# Altium PCB ADCS.PcbDoc
Units mm, origin at the board's own origin, x right, y up, seen from the top; angles counter-clockwise.
Board outline 35.05 x 86.56 mm, 2 copper layers (Top Layer, Bottom Layer); 55 components, 76 nets, 305 pads, 140 vias.
Unrouted connection lines stored in the file: 60.
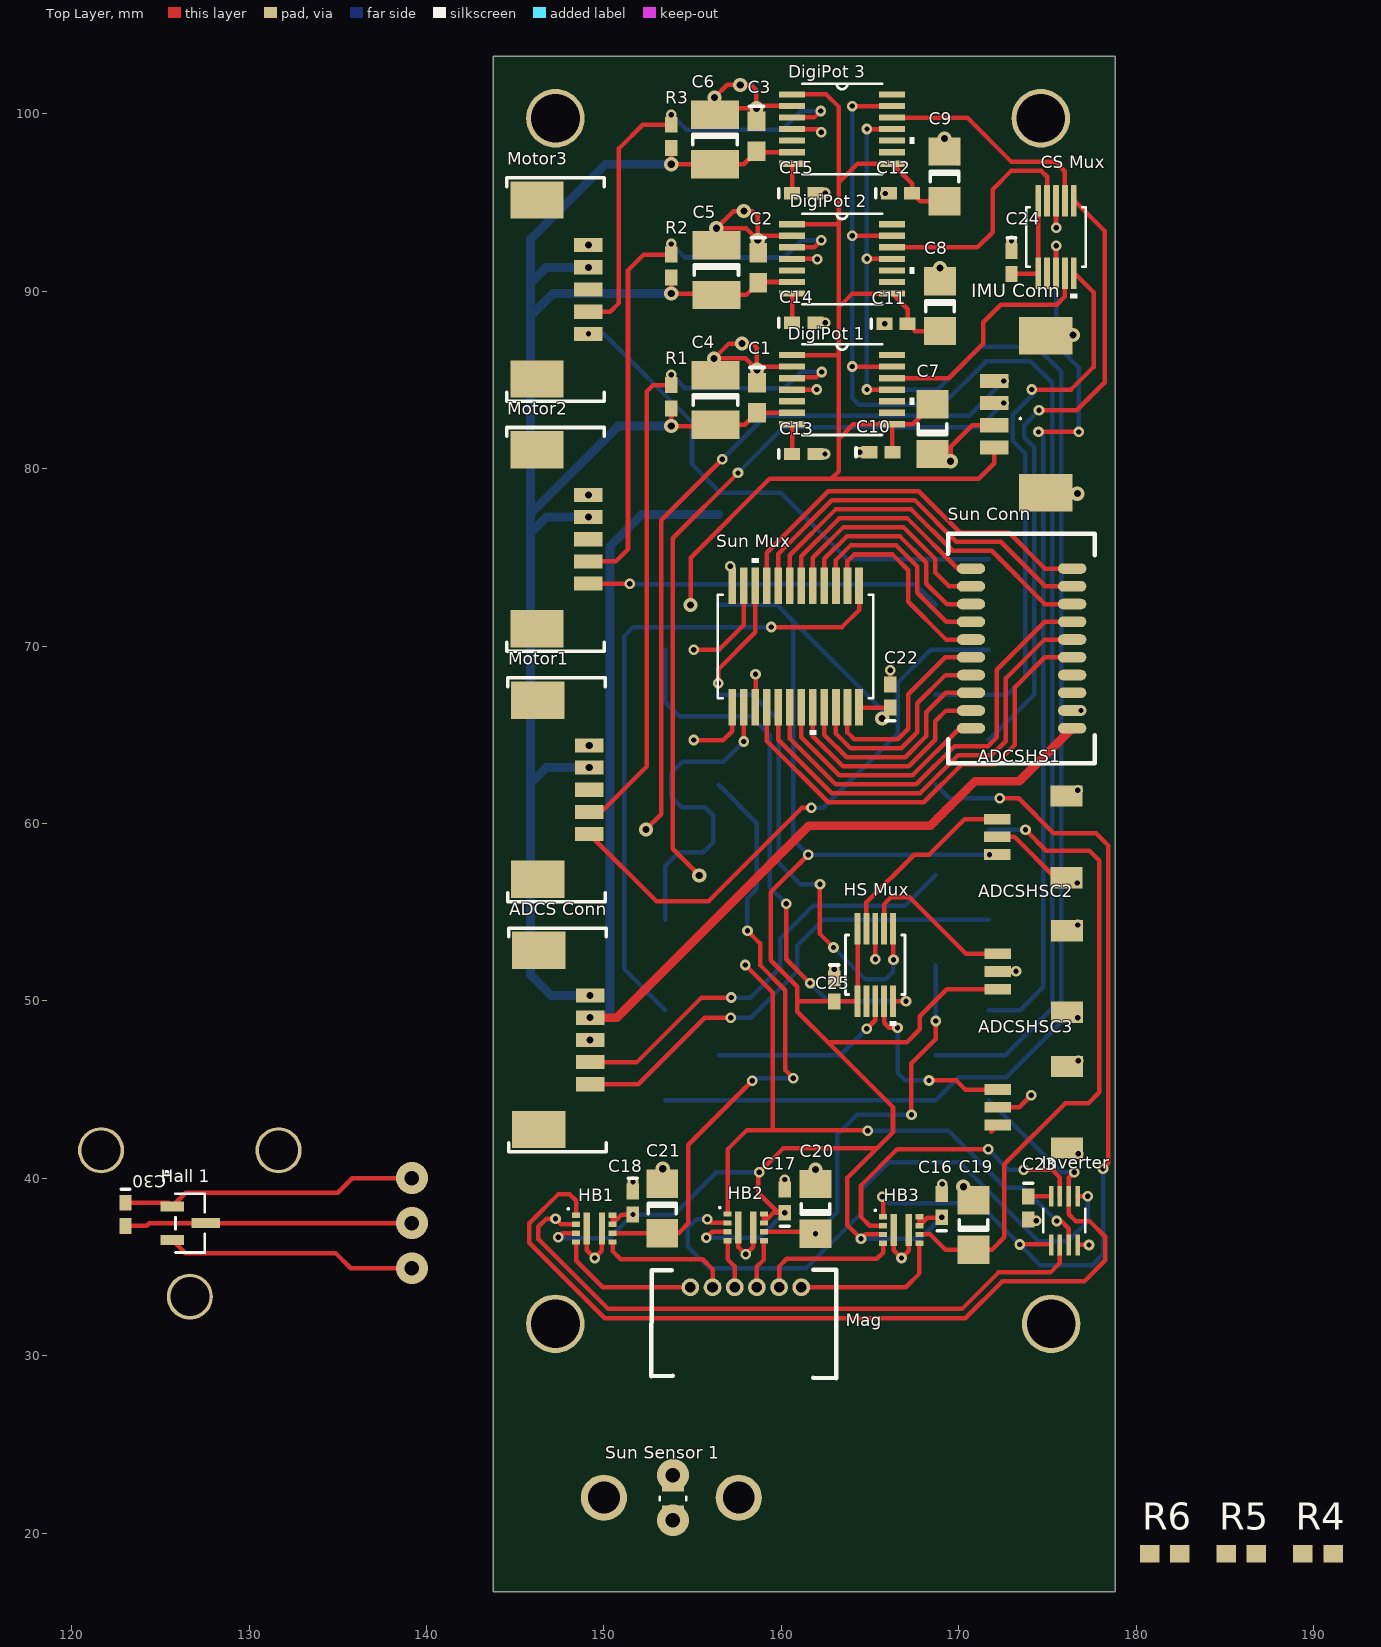
[diagram p0: Top Layer view]
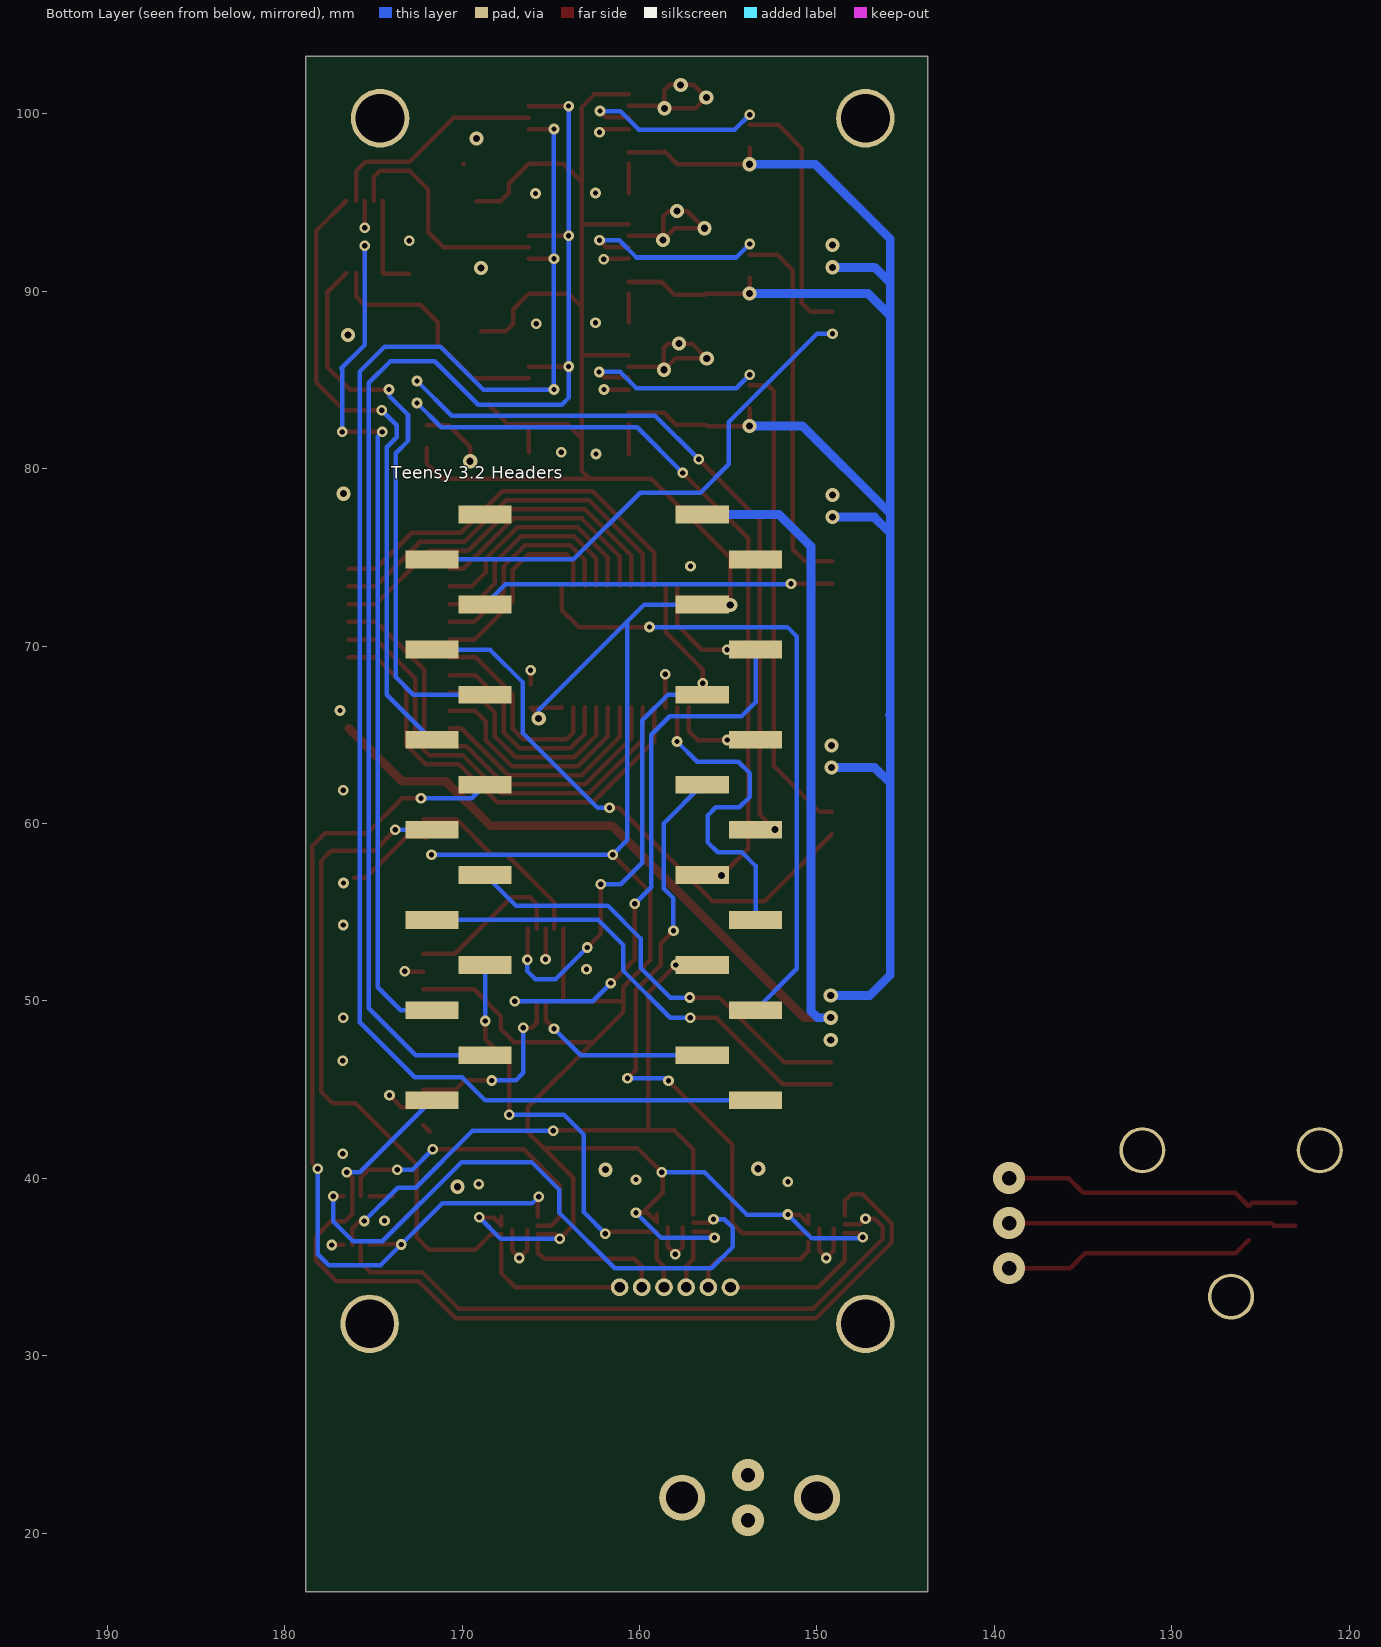
[diagram p1: Bottom Layer view, seen from below]

## Layer stack, top to bottom
Top Solder: solder mask 0.0102, Solder Resist, Dk 3.5
Top Layer: signal copper 0.0356
Dielectric 1: dielectric 0.32, FR-4, Dk 4.8
Bottom Layer: signal copper 0.0356
Bottom Solder: solder mask 0.0102, Solder Resist, Dk 3.5

## Board outline
143.764,103.251 178.816,103.251 178.816,16.688 143.764,16.688

## Design rules (kind name [scope] priority, off if disabled: settings)
Clearance Clearance_1 [All] p1: gap=0.254 ignorepadtopadclearanceinfootprint=FALSE except(0: Arc-Hole Track-Hole SMDPad-Hole THPad-Hole Via-Hole Fill-Hole Poly-Hole Region-Hole Text-Hole)
PolygonConnect [All] p1: connectstyle=Relief reliefconductorwidth=0.254 reliefentries=4 polygonreliefangle="90 Angle" airgapwidth=0.254
RoomDefinition Top [InComponentClass('Top')] p1: confinementstyle=ConfineIn formatcopy=TRUE lockcomponents=FALSE outline 0,0 50.8,0 50.8,25.4 0,25.4
RoutingVias [All] p1: holewidth=0.711 width=1.27 viastyle="Through Hole" minholewidth=0.711 minwidth=1.27 maxholewidth=0.711 maxwidth=1.27
SolderMaskExpansion [All] p1: expansion=0.102
Width [All] p1: maxlimit=0.254 minlimit=0.254 preferedwidth=0.254
30 further rules are at their usual default settings.

## Components (designator, comment, footprint, x,y, rotation, side; value= is the part's Value field where it differs from the comment)
"ADCS Conn" "Motor Connection" "Molex Picoblade 5 Pin" 144.825,53.903 r270 top
ADCSHS1 "501568-0307" 5015680307 178.396,54.117 r180 top
ADCSHSC2 "501568-0307" 5015680307 178.421,46.522 r180 top
ADCSHSC3 "501568-0307" 5015680307 178.421,38.874 r180 top
C1 "C0603" 0603 158.623,83.998 r270 top value="0.1uF (50V)"
C2 "C0603" 0603 158.699,91.313 r270 top value="0.1uF (50V)"
C3 "C0603" 0603 158.598,98.73 r270 top value="0.1uF (50V)"
C4 "C1210" 1210 156.286,83.871 r270 top value="10uF (50V)"
C5 "C1210" 1210 156.337,91.186 r270 top value="10uF (50V)"
C6 "C1210" 1210 156.261,98.552 r270 top value="10uF (50V)"
C7 "C1206" 1206 168.529,82.22 r90 top value="10uF (10V)"
C8 "C1206" 1206 168.935,89.154 r270 top value="10uF (10V)"
C9 "C1206" 1206 169.189,96.469 r270 top value="10uF (10V)"
C10 "C0402" 0402 165.608,80.924 r0 top value="0.1uF (10V)"
C11 "C0402" 0402 166.472,88.163 r0 top value="0.1uF (10V)"
C12 "C0402" 0402 166.726,95.529 r0 top value="0.1uF (10V)"
C13 "C0402" 0402 161.265,80.823 r0 top value="1uF (10V)"
C14 "C0402" 0402 161.265,88.214 r0 top value="1uF (10V)"
C15 "C0402" 0402 161.265,95.529 r0 top value="1uF (10V)"
C16 "C0402" 0402 169.037,38.456 r90 top value="1uF (10V)"
C17 "C0402" 0402 160.198,38.71 r90 top value="1uF (10V)"
C18 "C0402" 0402 151.638,38.608 r270 top value="1uF (10V)"
C19 "C1206" 1206 170.84,37.363 r90 top value="10uF (10V)"
C20 "C1206" 1206 161.925,38.278 r90 top value="10uF (10V)"
C21 "C1206" 1206 153.289,38.303 r270 top value="10uF (10V)"
C22 "C0402" 0402 166.141,67.183 r90 top value="0.1uF (10V)"
C23 "C0402" 0402 173.914,38.329 r270 top value="0.1uF (10V)"
C24 "C0402" 0402 172.974,91.618 r270 top value="0.1uF (10V)"
C25 "C0402" 0402 162.992,50.622 r270 top value="0.1uF (10V)"
C30 "C0402" 0402 123.038,37.973 r270 top value="0.1uF (10V)"
"CS Mux" "ADG704BRMZ-REEL" ADG704BRMZ-REEL 177.217,96.19 r270 top
"DigiPot 1" "AD5292BRUZ-20" AD5292BRUZ-20 166.218,82.545 r0 top
"DigiPot 2" "AD5292BRUZ-20" AD5292BRUZ-20 166.218,89.911 r0 top
"DigiPot 3" "AD5292BRUZ-20" AD5292BRUZ-20 166.218,97.231 r0 top
"Hall 1" "DRV5053EAQDBZR" DRV5053EAQDBZR 128.459,39.098 r270 top
HB1 "H-Bridge" AP1017 150.485,36.41 r0 top
HB2 "H-Bridge" AP1017 159.02,36.486 r0 top
HB3 "H-Bridge" AP1017 167.783,36.334 r0 top
"HS Mux" "ADG704BRMZ-REEL" ADG704BRMZ-REEL 167.032,55.169 r270 top
"IMU Conn" "Connector 4POS Molex PicoBlade" 532610471 172.004,84.938 r180 top
Inverter "SN74LVC3G14DCUR" SN74LVC3G14DCUR 174.4,35.687 r90 top
Mag "Magnetorquer" "Pressure Connector" 157.748,35.058 r0 top
Motor1 "Motor Connection" "Molex Picoblade 5 Pin" 144.774,68 r270 top
Motor2 "Motor Connection" "Molex Picoblade 5 Pin" 144.729,82.117 r270 top
Motor3 "Motor Connection" "Molex Picoblade 5 Pin" 144.729,96.194 r270 top
R1 "ERJ2GE" 2-0402 153.797,84.049 r270 top value="22K (0.1W)"
R2 "ERJ2GE" 2-0402 153.797,91.415 r270 top value="22K (0.1W)"
R3 "ERJ2GE" 2-0402 153.797,98.73 r270 top value="22K (0.1W)"
R4 "ERJ3EK" 3-0603 190.246,18.847 r0 top
R5 "ERJ3EK" 3-0603 185.928,18.847 r0 top
R6 "ERJ3EK" 3-0603 181.61,18.847 r0 top
"Sun Conn" "501571-2007" "501571-2007 20Pos Conn" 177.43,75.99 r270 top
"Sun Mux" "CD74HC4067SM96" CD74HC4067SM96 165.115,74.219 r270 top
"Sun Sensor 1" "TEMT6200FX01" Phototransistor 153,20.561 r90 top
"Teensy 3.2 Headers" "Teensy 3.2 Headers" "Teensy 3.2 with Headers" 171.704,77.419 r180 bottom

## Footprints (in the part's own frame and the unit in brackets; to place one, negate y for a bottom-side part, rotate by r counter-clockwise, add the part's x,y. Pads: shape width x height; smd on the part's side, far side on the other; paste and mask are expansions set on the pad)
2-0402 [mm] "Chip Resistor; Body 1 x 0.5 mm (LxW typ)"
  rect 0.9x0.7 smd: 1(-0.65,0) 2(0.65,0)
3-0603 [mm] "Chip Resistor; Body 1.6 x 0.9 mm (LxW typ)"
  rect 1.1x1 smd: 1(-0.85,0) 2(0.85,0)
0402 [mm] "Chip Capacitor; Body 1.0 x 0.5 mm (LxW typ)"
  rect 0.9x0.7 smd: 1(-0.65,0) 2(0.65,0)
  silkscreen extent -1.4,-0.25 -1.4,0.25
0603 [mm] "Chip Capacitor; Body 1.6 x 0.8 mm (LxW typ)"
  rect 1.1x1 smd: 1(-0.85,0) 2(0.85,0)
  silkscreen extent -1.7,-0.4 -1.7,0.4
1206 [mm] "Chip Capacitor; Body 3.2 x 1.6 mm (LxW typ)"
  rect 1.6x1.8 smd: 1(-1.4,0) 2(1.4,0)
  silkscreen extent -0.3,-0.8 0.3,0.8
1210 [mm] "Chip Capacitor; Body 3.2 x 2.5 mm (LxW typ)"
  rect 1.6x2.7 smd: 1(-1.4,0) 2(1.4,0)
  silkscreen extent -0.3,-1.25 0.3,1.25
"501571-2007 20Pos Conn" [mm] "Pico-Clasp 1.0mm 20Pos"
  oval 0.6x1.6 smd: 1(1.626,-6.741) 2(2.626,-6.741) 3(3.626,-6.741) 4(4.626,-6.741) 5(5.626,-6.741) 6(6.626,-6.741) 7(7.626,-6.741) 8(8.626,-6.741) 9(9.626,-6.741) 10(10.626,-6.741) 11(1.626,-1.041) 12(2.626,-1.041) 13(3.626,-1.041) 14(4.626,-1.041) 15(5.626,-1.041) 16(6.626,-1.041) 17(7.626,-1.041) 18(8.626,-1.041) 19(9.626,-1.041) 20(10.626,-1.041)
  silkscreen extent -0.35,-8.04 12.6,0.24
532610471 [mm] "Connector 4POS Molex PicoBlade"
  rect 1.6x0.8 smd: 1(0,3.75) 2(0,2.5) 3(0,1.25) 4(0,0)
  rect 3x2.1 smd: ""(-2.9,6.3) ""(-2.9,-2.55)
  silkscreen extent -1.52,2.07 -1.42,2.17, body extent -4.71,-3.81 1.02,7.56, height 0.6
5015680307 [mm]
  rect 1.5x0.6 smd: 1(6.223,-4.13) 2(6.223,-5.13) 3(6.223,-6.13)
  rect 1.8x1.2 smd: GND(2.323,-2.83) GND(2.323,-7.43)
  body extent 1.12,-8.33 7.24,-1.93, height 0.6
AD5292BRUZ-20 [mil]
  rect 58x14 smd: 1(-221,151.77) 2(-221,126.18) 3(-221,100.59) 4(-221,75) 5(-221,49.41) 6(-221,23.82) 7(-221,-1.77) 8(1,-1.77) 9(1,23.82) 10(1,49.41) 11(1,75) 12(1,100.59) 13(1,126.18) 14(1,151.77)
  silkscreen extent -198,-26 50,176, body extent -110,75 -100,85, height 10
ADG704BRMZ-REEL [mil] "Mux 4:1"
  rect 70x13 smd: 1(43,-29) 2(43,-48.69) 3(43,-68.37) 4(43,-88.06) 5(43,-107.74) 6(204,-107.74) 7(204,-88.06) 8(204,-68.37) 9(204,-48.69) 10(204,-29)
  silkscreen extent 58,-134 259,-2, body extent 124,-68 134,-58, height 10
AP1017 [mm] "SON, 8-Leads, Body 2.00x2.00mm, Pitch 0.50mm, Thermal Pad 1.80x1.07mm, IPC Medium Density"
  rect 0.45x0.3 smd: 1(-2.05,1.5) 2(-2.05,1) 3(-2.05,0.5) 4(-2.05,0) 5(0,0) 6(0,0.5) 7(0,1) 8(0,1.5)
  rect 0.35x1.8 smd: 9(-1.45,0.75) 9(-0.6,0.75)
  silkscreen extent -2.54,1.81 -2.44,1.91, body extent -2.05,-0.27 0,1.78, height 0.6
CD74HC4067SM96 [mil] "16:1 Mux"
  rect 81x17 smd: 1(32,-29) 2(32,-54.59) 3(32,-80.18) 4(32,-105.77) 5(32,-131.36) 6(32,-156.95) 7(32,-182.54) 8(32,-208.13) 9(32,-233.72) 10(32,-259.31) 11(32,-284.91) 12(32,-310.5) 13(302,-310.5) 14(302,-284.91) 15(302,-259.31) 16(302,-233.72) 17(302,-208.13) 18(302,-182.54) 19(302,-156.95) 20(302,-131.36) 21(302,-105.77) 22(302,-80.18) 23(302,-54.59) 24(302,-29)
  silkscreen extent -28,-342 362,3, body extent 167,-170 177,-160, height 10
DRV5053EAQDBZR [mil] "Hall Sensor Linear SOT-23-3"
  rect 22x52 smd: 1(26.6,-110) 2(101.4,-110)
  rect 22x62.5 smd: 3(64,-35.25)
  silkscreen extent -51,-127 129,-37, body extent 64,-70 74,-60, height 10
"Molex Picoblade 5 Pin" [mm] "Molex Picoblade Header, SMT, Right Angle  53261-0571"
  rect 0.8x1.6 smd: 0(3.6,4.4) 1(4.85,4.4) 2(6.1,4.4) 3(7.35,4.4) 4(8.6,4.4)
  rect 2.1x3 smd: 5(1.05,1.5) 6(11.15,1.5)
  silkscreen extent -0.2,-0.2 12.4,5.3, body extent 0.4,0 11.8,5.2, height 3.4
Phototransistor [mil]
  rect 32x49 smd: 1(23.5,-35) 2(86.5,-35)
  silkscreen extent 52,-64 58,-5, body extent 55,-35 65,-25, height 10
"Pressure Connector" [mm] "53048-0610"
  round 1 hole 0.6 mask+0.076: 1(-2.875,-1.2) 2(-1.625,-1.2) 3(-0.375,-1.2) 4(0.875,-1.2) 5(2.125,-1.2) 6(3.375,-1.2)
  silkscreen extent -5.07,-6.32 5.35,-0.23, body extent -4.45,-6.08 4.8,-0.58, height 1.75
SN74LVC3G14DCUR [mil] "IC INVERTER TRPL S-T US8"
  rect 46x10 smd: 1(22,-31.47) 2(22,-51.16) 3(22,-70.84) 4(22,-90.53) 5(130,-90.53) 6(130,-70.84) 7(130,-51.16) 8(130,-31.47)
  silkscreen extent 50,-108 102,-14, body extent 76,-61 86,-51, height 10
"Teensy 3.2 with Headers" [mm]
  rect 3x1 smd: 1(3,0) 2(0,-2.54) 3(3,-5.08) 4(0,-7.62) 5(3,-10.16) 6(0,-12.7) 7(3,-15.24) 8(0,-17.78) 9(3,-20.32) 10(0,-22.86) 11(3,-25.4) 12(0,-27.94) 13(3,-30.48) 14(0,-33.02) 20(18.24,-33.02) 21(15.24,-30.48) 22(18.24,-27.94) 23(15.24,-25.4) 24(18.24,-22.86) 25(15.24,-20.32) 26(18.24,-17.78) 27(15.24,-15.24) 28(18.24,-12.7) 29(15.24,-10.16) 30(18.24,-7.62) 31(15.24,-5.08) 32(18.24,-2.54) 33(15.24,0)
  body extent -1.09,-34.49 19.35,1.16, height 0.25

## Part data
"ADCS Conn" Motor1 Motor2 Motor3: library part "PIKSI_UART Connector", "Molex Picoblade 5 Pin"
ADCSHS1 ADCSHSC2 ADCSHSC3: "CONN HEADER 1MM 3POS"
C1 C2 C3 C4 C5 C6 C7 C8 C9 C10 C11 C12 C13 C14 C15 C16 C17 C18 C19 C20 C21 C22 C23 C24 C25 C30: "Ceramic Chip Capacitor - Standard", PackageDocument=Mar-2001, ComponentLink1Description="Manufacturer Link", ComponentLink1URL=http://www.kemet.com/, ComponentLink2Description=Datasheet, ComponentLink2URL=http://www.kemet.com/kemet/web/homepage/kechome.nsf/vapubfilesname/F3102TA.pdf/$file/F3102TA.pdf, DatasheetDocument=Mar-2001, LatestRevisionDate=19-Mar-2004, LatestRevisionNote="Silkscreen size reduced.", Published=17-Jul-2002, Publisher="Altium Limited"
  C1 C2 C3: Code_IPC="1608 [0603]", Code_JEITA=0603, Note="Footprint corresponds to dimensions for bulk cassette packaging. This case size has tightened tolerances.", PackageReference=0603
  C4 C5 C6: Code_IPC="3225 [1210]", Code_JEITA=1210, PackageReference=1210
  C7 C8 C9 C19 C20 C21: Code_IPC="3216 [1206]", Code_JEITA=1206, PackageReference=1206
  C10 C11 C12 C13 C14 C15 C16 C17 C18 C22 C23 C24 C25 C30: Code_IPC="1005 [0402]", Code_JEITA=0402, Note="Footprint corresponds to dimensions for bulk cassette packaging. This case size has tightened tolerances.", PackageReference=0402
"DigiPot 1" "DigiPot 2" "DigiPot 3": "20K DigiPot 1024POS"
"Hall 1": "Hall Sensor Linear SOT-23-3"
HB1 HB2 HB3: library part AP1017AEN
"IMU Conn": library part 532610471
Mag: library part PressureConnector, "Molex 70553-0005"
R1 R2 R3: "Thick Film Chip Resistor, 1 Ohm to 2.2M Ohm Range, 5% Tolerance, 0402 Size, 0.063 W", PackageDocument=Mar-2003, Code_IPC="1005 [0402]", ComponentLink1Description="Manufacturer Link", ComponentLink1URL=http://www.panasonic.com/industrial/components/resistive_products.htm, ComponentLink2Description=Datasheet, ComponentLink2URL=http://www.panasonic.com/industrial/components/pdf/AOA0000CE1.pdf, LatestRevisionDate=19-Mar-2004, LatestRevisionNote="Silkscreen size reduced.", Note="If flow soldering, adjust pad width of PCB Footprint to 0.7 - 0.8 times the width of the resistor.", PackageReference=2-0402, Published=17-Dec-2003, Publisher="Altium Limited"
R4 R5 R6: "Precision Thick Film Chip Resistor, 10 Ohm to 1M Ohm Range, 1% and 0.5% Tolerance, 0603 Size, 0.063 W", PackageDocument=Mar-2003, Resistance="300 +/-1%", Code_IPC="1608 [0603]", ComponentLink1Description="Manufacturer Link", ComponentLink1URL=http://www.panasonic.com/industrial/components/resistive_products.htm, ComponentLink2Description=Datasheet, ComponentLink2URL=http://www.panasonic.com/industrial/components/pdf/AOA0000CE2.pdf, LatestRevisionDate=19-Mar-2004, LatestRevisionNote="Silkscreen size reduced.", PackageReference=3-0603, Published=17-Dec-2003, Publisher="Altium Limited"
"Sun Conn": "Pico-Clasp 1.0mm 20POS"

## Free pads (board coordinates)
  round 2.6 hole 2.2: 6(121.663,41.582) 6(126.663,33.332) 6(131.663,41.582)
  round 3.302 hole 2.75: 6(147.269,31.801) 6(147.269,99.746) 6(174.625,99.746) 6(175.209,31.801)
  round 2.6 hole 1.8: 6(150,22) 6(157.6,22)

## Via types
v1: diameter 0.6, hole 0.3, Top Layer to Bottom Layer, 102 vias
v2: diameter 0.8, hole 0.4, Top Layer to Bottom Layer, 33 vias
v3: diameter 1.8, hole 0.813, Top Layer to Bottom Layer, 4 vias
v4: diameter 1.8, hole 0.813, Top Layer to Bottom Layer, tented top, 1 vias

## Nets (pads, with @x,y where several pads share a name; then routed paths per layer and width w, separated by ;. In a path a pad name is that pad's centre, name@x,y a point inside that pad or via, vN(x,y) a via of type N, cw(c..) or ccw(c..) an arc to the next point about the centre after c; other vN are vias at no path point)
3.3V: "CS Mux.5" "CS Mux.6" "DigiPot 1.1" "DigiPot 1.8" "DigiPot 2.1" "DigiPot 2.8" "DigiPot 3.1" "DigiPot 3.8" "HS Mux.5" "HS Mux.6" "IMU Conn.1" "Sun Mux.24" "Teensy 3.2 Headers.31" ADCSHS1.1 ADCSHSC2.1 ADCSHSC3.1 C7.2 C8.2 C9.2 C10.2 C11.2 C12.2 C16.1 C17.1 C18.2 C22.1 C23.1 C24.2 C25.2 HB1.3 HB1.7 HB1.8 HB2.3 HB2.7 HB2.8 HB3.3 HB3.7 HB3.8 Inverter.8 | length 208.7
  Top Layer w0.254: v1(147.422,36.678) 147.654,36.91 HB1.3 ; HB1.8 150.485,37.441 151.002,37.958 v1(151.638,37.958) ; v2(154.889,72.314) 154.889,74.981 159.334,79.426 162.814,79.426 ; v1(155.778,36.652) 156.112,36.986 HB2.3 ; HB2.8 159.02,37.517 159.562,38.06 159.832,38.06 ; v1(160.198,38.06) 159.832,38.06 ; 160.605,86.4 163.231,86.4 163.246,86.385 ; 160.605,93.766 163.235,93.766 163.246,93.777 ; 160.604,101.086 162.54,101.086 163.246,100.381 163.246,96.139 ; v1(161.519,58.242) 159.41,56.134 159.41,52.299 160.907,50.802 160.907,49.962 ; 164.249,49.987 164.234,49.972 C25.2 160.917,49.972 160.907,49.962 ; 164.295,49.987 164.295,54.077 ; 164.378,66.548 164.393,66.533 C22.1 165.684,66.076 v2(165.684,65.913) ; HB3.3 164.723,36.834 v1(164.49,36.601) 163.728,37.363 163.728,40.03 165.405,41.707 ; C10.2 166.258,82.486 166.243,82.5 ; HB3.8 HB3.7 168.219,37.77 169.001,37.77 v1(169.037,37.806) C16.1@168.823,37.806 ; C7.2 167.41,82.5 166.243,82.5 ; C8.2 167.531,87.754 C11.2 167.122,88.988 166.243,89.866 164.009,89.866 163.246,89.103 ; C9.2 167.836,95.069 C12.2 167.376,96.054 166.243,97.186 164.293,97.186 163.246,96.139 ; 169.913,97.17 169.926,97.183 ; 171.826,42.632 ADCSHSC3.1 ; 172.004,81.188 172.004,80.31 171.12,79.426 162.814,79.426 ; ADCSHSC2.1 169.321,50.652 167.81,49.141 167.81,48.404 167.061,47.655 162.636,47.655 ; C24.2 174.394,90.968 174.434,91.008 ; C23.1 175.181,38.979 Inverter.8@175.192,38.989 ; 174.481,91.008 174.481,95.098 ; 159.832,38.06 158.699,39.192 158.699,40.284 v1(158.75,40.335) 160.122,41.707 165.405,41.707 ; 160.907,49.962 160.907,49.385 162.636,47.655 ; 162.636,47.655 166.294,43.997 166.294,42.596 165.405,41.707 ; 162.814,79.426 163.246,79.858 163.246,81.686 ; 163.246,81.686 163.246,86.385 ; 163.246,81.686 164.06,82.5 166.243,82.5 ; 163.246,86.385 163.246,89.103 ; 163.246,89.103 163.246,93.777 ; 163.246,93.777 163.246,96.139
  Bottom Layer w0.254: v1(147.422,36.678) 147.472,36.627 150.307,36.627 v1(151.638,37.958) 153.96,37.958 156.337,40.335 v1(158.75,40.335) ; v1(155.778,36.652) 158.79,36.652 v1(160.198,38.06) ; 156.464,72.339 159.741,72.339 160.68,71.399 ; v1(164.49,36.601) 167.833,36.601 v1(169.037,37.806) ; v2(165.684,65.913) 165.684,66.396 160.68,71.399 ; v1(171.729,58.242) v1(161.519,58.242) 160.68,59.08 160.68,71.399
5V_3: "ADCS Conn.1" "Sun Conn.20" "Teensy 3.2 Headers.33" | length 68.2
  Top Layer w0.5: v2(149.225,49.053) 150.729,49.053 161.544,59.868 168.402,59.868 170.917,62.382 173.406,62.382 176.388,65.365
  Bottom Layer w0.5: v2(149.225,49.053) 149.967,49.053 150.343,49.428 150.343,75.616 152.146,77.419 156.464,77.419
24V: "ADCS Conn.0" "DigiPot 1.6" "DigiPot 2.6" "DigiPot 3.6" C1.2 C2.2 C3.2 C4.2 C5.2 C6.2 Motor1.1 Motor2.1 Motor3.1 R1.2 R2.2 R3.2 | length 108.6
  Top Layer w0.254: R1.2 v2(153.797,82.398) 156.213,82.398 C4.2 157.946,82.471 C1.2 158.626,83.15 160.605,83.15 160.6,83.146 ; R2.2 v2(153.797,89.865) 156.257,89.865 C5.2 158.022,89.786 C2.2 158.752,90.516 160.605,90.516 ; R3.2 v2(153.797,97.155) 157.873,97.155 C3.2 158.641,97.836 160.604,97.836 160.595,97.827
  Bottom Layer w0.4: 145.872,66.116 145.963,66.116
  Bottom Layer w0.5: v2(149.129,77.267) 146.761,77.267 145.872,76.378 ; v2(149.129,91.344) 146.741,91.344 145.872,90.475 ; v2(149.174,63.15) 146.741,63.15 145.872,62.281 ; v2(149.225,50.303) 147.03,50.303 145.872,51.46 145.872,62.281 ; v2(153.797,82.398) 150.8,82.398 145.872,77.47 ; v2(153.797,89.865) 147.117,89.865 145.872,88.621 ; v2(153.797,97.155) 150.089,97.155 145.872,92.939 145.872,90.475 ; 145.872,62.281 145.872,66.116 145.872,76.378 ; 145.872,76.378 145.872,77.47 ; 145.872,77.47 145.872,88.621 ; 145.872,88.621 145.872,90.475
A0: "HS Mux.8" "Teensy 3.2 Headers.21" | length 10.7
  Top Layer w0.254: v1(164.821,48.438) 165.295,48.912 165.295,49.987
  Bottom Layer w0.254: 156.464,46.939 163.322,46.939 v1(164.821,48.438)
A1: "Sun Mux.1" "Teensy 3.2 Headers.22" | length 37.3
  Top Layer w0.254: v1(159.436,71.069) 163.424,71.069 164.378,72.024 164.378,73.406
  Bottom Layer w0.254: 153.464,49.479 151.135,51.808 151.135,70.541 151.663,71.069 v1(159.436,71.069)
CS: "CS Mux.8" "Teensy 3.2 Headers.12" | length 49.9
  Top Layer w0.254: v1(174.498,82.067) v1(176.759,82.067) ; 175.481,91.008 175.481,92.55 v1(175.489,92.558)
  Bottom Layer w0.254: 171.704,49.479 173.457,49.479 174.752,50.775 174.752,81.813 v1(174.498,82.067) ; v1(175.489,92.558) 175.489,86.97 176.809,85.649 176.759,85.598 v1(176.759,82.067)
DOUT: "DigiPot 1.13" "DigiPot 2.13" "DigiPot 3.13" "Teensy 3.2 Headers.13" | length 79
  Top Layer w0.254: v1(164,85.75) 166.243,85.75 ; v1(164,93.116) 166.243,93.116 ; v1(164,100.432) 166.238,100.432 166.243,100.436
  Bottom Layer w0.254: v1(164,100.432) v1(164,93.116) v1(164,85.75) 164,83.98 164.389,83.591 169.088,83.591 171.552,86.055 174.041,86.055 175.26,84.836 175.26,49.581 172.618,46.939 168.704,46.939
GND: "ADCS Conn.2" "CS Mux.3" "DigiPot 1.4" "DigiPot 1.9" "DigiPot 2.4" "DigiPot 2.9" "DigiPot 3.4" "DigiPot 3.9" "HS Mux.3" "IMU Conn.2" "Sun Conn.19" "Sun Mux.12" "Sun Mux.15" "Teensy 3.2 Headers.1" "Teensy 3.2 Headers.32" ADCSHS1.2 ADCSHSC2.2 ADCSHSC3.2 C7.1 C8.1 C9.1 C10.1 C11.1 C12.1 C13.2 C14.2 C15.2 C16.2 C17.2 C18.1 C19.2 C20.2 C21.1 C22.2 C23.2 C24.1 C25.1 HB1.9 HB2.9 HB3.9 Inverter.4 Motor1.0 Motor2.0 Motor3.0 pad.6@147.269,31.801 pad.6@147.269,99.746 pad.6@174.625,99.746 pad.6@175.209,31.801 | length 45.7
  Top Layer w0.254: HB1.9@149.041,37.16 149.041,35.947 v1(149.479,35.509) 149.879,35.91 HB1.9@149.879,37.16 ; 156.21,86.208 157.048,87.046 v2(157.785,87.046) 158.394,87.046 158.623,86.817 158.623,85.573 ; 156.235,100.914 156.947,101.625 v2(157.683,101.625) 158.293,101.625 158.598,101.321 158.598,100.305 ; 156.337,93.548 157.302,94.513 v2(157.886,94.513) 158.369,94.513 158.674,94.209 158.674,92.888 ; HB2.9@157.576,37.236 157.576,36.125 v1(157.988,35.712) 158.414,36.138 HB2.9@158.414,37.236 ; 158.528,66.548 158.547,66.566 v1(158.547,68.402) ; 160.605,84.45 161.997,84.45 v1(162.001,84.455) ; 160.605,91.816 162.006,91.816 v1(162.027,91.796) ; 160.604,99.136 162.077,99.136 v1(162.255,98.958) ; 165.295,54.077 165.295,52.357 v1(165.303,52.349) ; C22.2 v1(166.141,68.631) ; HB3.9@166.339,37.084 166.339,35.947 v1(166.776,35.509) 167.177,35.91 HB3.9@167.177,37.084 ; v2(169.545,80.416) 169.545,81.229 170.754,82.438 172.004,82.438 ; ADCSHS1.2@172.083,59.157 ADCSHS1.2 173.138,59.247 175.438,56.947 176.073,56.947 ; ADCSHSC3.2 173.417,44.004 v1(174.092,44.679) ; ADCSHSC2.2 173.217,51.652 v1(173.228,51.664) ; 175.481,95.098 175.481,93.582 v1(175.489,93.574) ; Inverter.4 v1(177.343,36.246)
  other v1: 174.371,37.617 169.062,39.675 151.638,39.802 160.198,39.929 162.992,51.791 176.682,56.642 157.124,74.498 162.458,80.823 164.414,80.924 165.822,88.163 162.484,88.214 172.974,92.837 165.862,95.504 162.484,95.529
  other v2: 170.256,39.522 161.925,40.488 153.314,40.538 149.225,47.803 149.174,64.4 149.129,78.517 168.935,91.313 149.129,92.594 169.189,98.603
GPIO_0: "Teensy 3.2 Headers.2" Motor3.4 | length 29.2
  Bottom Layer w0.254: v1(149.129,87.594) 149.998,87.594 154.965,82.626 154.965,80.239 156.566,78.638 159.969,78.638 163.728,74.879 171.704,74.879
GPIO_1: "Teensy 3.2 Headers.3" Motor2.4 | length 20.1
  Top Layer w0.254: Motor2.4 151.451,73.517 v1(151.46,73.508)
  Bottom Layer w0.254: v1(151.46,73.508) 151.481,73.487 167.556,73.487 168.704,72.339
GPIO_2: "Teensy 3.2 Headers.4" Motor1.4 | length 31.6
  Top Layer w0.254: Motor1.4 152.948,55.626 155.905,55.626 161.163,60.884 v1(161.696,60.884)
  Bottom Layer w0.254: v1(161.696,60.884) 162.369,60.884 166.573,65.088 166.573,67.947 168.425,69.799 171.704,69.799
GPIO_3: "CS Mux.10" "Teensy 3.2 Headers.5" | length 32.1
  Top Layer w0.254: v1(174.117,84.455) 176.327,84.455 177.597,85.725 177.597,89.938 176.527,91.008
  Bottom Layer w0.254: 168.704,67.259 172.745,67.259 173.736,68.25 173.736,80.874 173.05,81.559 173.05,83.033 174.117,84.099 v1(174.117,84.455)
GPIO_4: "CS Mux.1" "Teensy 3.2 Headers.6" | length 35.5
  Top Layer w0.254: v1(174.523,83.287) 176.657,83.287 178.232,84.861 178.232,93.392 176.527,95.098
  Bottom Layer w0.254: 171.704,64.719 174.244,67.259 174.244,81.204 173.685,81.763 173.685,82.448 v1(174.523,83.287)
GPIO_5: "Teensy 3.2 Headers.7" HB3.1 Inverter.1 | length 51.5
  Top Layer w0.254: v1(165.684,38.964) 165.733,38.915 HB3.1 ; v1(172.314,61.417) 173.38,61.417 175.362,59.436 177.749,59.436 178.435,58.75 178.435,40.843 v1(178.13,40.538) ; v1(173.431,36.271) 175.166,36.271 Inverter.1@175.192,36.246
  Bottom Layer w0.254: v1(165.684,38.964) 166.065,38.583 171.12,38.583 v1(173.431,36.271) 174.6,35.103 177.521,35.103 178.13,35.712 v1(178.13,40.538) ; 168.704,62.179 169.466,61.417 v1(172.314,61.417)
GPIO_12: "Teensy 3.2 Headers.14" HB1.1 Inverter.6 | length 53.8
  Top Layer w0.254: HB1.1 148.435,38.737 148.082,39.091 147.414,39.091 145.796,37.472 145.796,36.366 150.056,32.106 170.365,32.106 172.448,34.188 177.063,34.188 178.257,35.382 178.257,36.703 177.368,37.592 176.581,37.592 176.2,37.973 Inverter.6 176.2,40.03 v1(176.505,40.335)
  Bottom Layer w0.254: 171.704,44.399 175.768,40.335 v1(176.505,40.335)
GPIO_16: "Teensy 3.2 Headers.23" HB2.1 Inverter.3 | length 36.5
  Top Layer w0.254: HB2.1 156.97,41.628 158.039,42.697 159.512,42.697 ; v1(157.963,52.019) 159.512,50.47 159.512,42.697 ; v1(164.871,42.672) 164.846,42.697 159.512,42.697 ; v1(175.514,37.592) 175.768,37.592 176.2,37.16 Inverter.3
  Bottom Layer w0.254: v1(164.871,42.672) 169.418,42.672 172.618,39.472 173.634,39.472 v1(175.514,37.592)
GPIO_17: "Sun Mux.14" "Teensy 3.2 Headers.24" | length 18.7
  Top Layer w0.254: 157.878,66.548 157.878,64.626 v1(157.886,64.618)
  Bottom Layer w0.254: 153.464,54.559 153.464,57.604 154.229,58.369 155.6,58.369 156.159,58.928 156.159,60.452 155.702,60.909 154.381,60.909 153.797,61.493 153.797,62.84 154.432,63.475 156.743,63.475 v1(157.886,64.618)
GPIO_21: "Sun Mux.13" "Teensy 3.2 Headers.28" | length 3.7
  Top Layer w0.254: v1(155.06,64.701) 156.725,64.701 157.228,65.204 157.228,66.548
GPIO_22: "HS Mux.1" "Sun Mux.10" "Teensy 3.2 Headers.29" | length 31.8
  Top Layer w0.254: v1(156.439,67.894) 156.439,68.682 158.528,70.771 158.528,73.406 ; v1(162.179,56.566) 162.179,53.772 v1(162.941,53.01) ; 166.295,54.077 166.295,52.348 v1(166.319,52.324)
  Bottom Layer w0.254: 156.464,67.259 158.394,67.259 159.842,65.811 159.842,57.785 161.061,56.566 v1(162.179,56.566) ; v1(162.941,53.01) 164.719,51.232 165.887,51.232 166.319,51.664 v1(166.319,52.324)
GPIO_23: "HS Mux.10" "Sun Mux.11" "Teensy 3.2 Headers.30" | length 36.7
  Top Layer w0.254: v1(155.067,69.799) 156.489,69.799 157.878,71.188 157.878,73.406 ; v1(160.274,55.474) 160.274,52.349 v1(161.62,51.003) ; 166.341,49.987 v1(167.03,49.987)
  Bottom Layer w0.254: 153.464,69.799 153.464,66.83 154.254,66.04 158.293,66.04 159.334,64.999 159.334,56.413 v1(160.274,55.474) ; v1(161.62,51.003) 162.636,49.987 v1(167.03,49.987)
HS1: "HS Mux.4" ADCSHS1.3 | length 10.8
  Top Layer w0.254: 164.795,54.077 164.795,55.55 167.488,58.242 168.326,58.242 170.33,60.247 ADCSHS1.3
HS2: "HS Mux.2" ADCSHSC2.3 | length 9.3
  Top Layer w0.254: 165.795,54.077 165.795,55.458 166.167,55.829 167.234,55.829 170.411,52.652 ADCSHSC2.3
HS3: "HS Mux.9" ADCSHSC3.3 | length 10.7
  Top Layer w0.254: 165.795,49.987 165.795,48.759 166.065,48.489 v1(166.548,48.489) ; v1(168.326,45.517) 169.85,45.517 170.362,45.004 ADCSHSC3.3
  Bottom Layer w0.254: v1(166.548,48.489) 166.548,45.949 166.98,45.517 v1(168.326,45.517)
Mag1A: HB1.4 Mag.1 | length 8.1
  Top Layer w0.254: HB1.4 148.435,35.359 149.936,33.858 Mag.1
Mag1B: Mag.2 R6.2 | length 7.6
  Top Layer w0.254: 150.485,36.41 150.485,35.9 150.952,35.433 155.575,35.433 156.123,34.885 Mag.2
Mag2A: HB2.4 Mag.3 | length 2.8
  Top Layer w0.254: HB2.4 156.97,35.435 157.373,35.032 Mag.3
Mag2B: Mag.4 R5.2 | length 2.8
  Top Layer w0.254: Mag.4 158.623,35.027 159.02,35.423 159.02,36.486
Mag3A: HB3.4 Mag.5 | length 7.9
  Top Layer w0.254: Mag.5 159.873,35.032 160.299,35.458 165.379,35.458 165.733,35.812 HB3.4
Mag3B: Mag.6 R4.2 | length 8.7
  Top Layer w0.254: Mag.6 167.005,33.858 167.783,34.636 167.783,36.334
NetC1_1: "DigiPot 1.2" C1.1 C4.1 | length 4.7
  Top Layer w0.254: v2(156.21,86.208) 157.988,86.208 v2(158.623,85.573) 158.801,85.75 160.605,85.75
NetC2_1: "DigiPot 2.2" C2.1 C5.1 | length 4.6
  Top Layer w0.254: v2(156.337,93.548) 158.013,93.548 v2(158.674,92.888) 158.902,93.116 160.605,93.116
NetC3_1: "DigiPot 3.2" C3.1 C6.1 | length 4.7
  Top Layer w0.254: v2(156.235,100.914) 156.845,100.305 v2(158.598,100.305) 158.729,100.436 160.604,100.436
NetC13_1: "DigiPot 1.7" C13.1 | length 1.7
  Top Layer w0.254: 160.605,82.5 160.615,82.49 C13.1
NetC14_1: "DigiPot 2.7" C14.1 | length 1.7
  Top Layer w0.254: 160.605,89.866 160.615,89.856 C14.1
NetC15_1: "DigiPot 3.7" C15.1 | length 1.7
  Top Layer w0.254: 160.604,97.186 160.615,97.176 C15.1
NetC30_1: "Hall 1.1" C30.1 | length 16.9
  Top Layer w0.254: C30.1 125.465,38.623 125.665,38.423 126.435,39.192 135.001,39.192 135.821,40.012 v3(139.175,40.012)
"NetDigiPot 1_3": "DigiPot 1.3" Motor1.3 R1.1 | length 38
  Top Layer w0.254: Motor1.3 149.855,60.65 152.425,63.221 152.425,84.353 152.771,84.699 R1.1 ; 160.605,85.1 160.64,85.136 161.971,85.136 v1(162.281,85.446)
  Bottom Layer w0.254: v1(153.797,85.293) 154.559,84.531 160.172,84.531 161.087,85.446 v1(162.281,85.446)
"NetDigiPot 2_3": "DigiPot 2.3" Motor2.3 R2.1 | length 32
  Top Layer w0.254: Motor2.3 150.662,74.767 151.359,75.463 151.359,91.186 152.237,92.065 R2.1 ; 160.605,92.466 160.615,92.477 161.869,92.477 v1(162.255,92.862)
  Bottom Layer w0.254: v1(153.797,92.659) 154.559,91.897 160.172,91.897 161.138,92.862 v1(162.255,92.862)
"NetDigiPot 3_3": "DigiPot 3.3" Motor3.3 R3.1 | length 25.1
  Top Layer w0.254: Motor3.3 150.363,88.844 150.851,89.332 150.851,98.044 152.186,99.38 R3.1 ; 160.604,99.786 160.61,99.792 161.869,99.792 v1(162.23,100.152)
  Bottom Layer w0.254: v1(153.797,99.949) 154.635,99.111 160.045,99.111 161.087,100.152 v1(162.23,100.152)
"NetHall 1_2": "Hall 1.2" | length 14.2
  Top Layer w0.254: 125.665,36.523 126.4,35.789 134.874,35.789 135.73,34.932 v3(139.175,34.932)
"NetHall 1_3": "Hall 1.3" C30.2 | length 16.2
  Top Layer w0.254: C30.2 124.234,37.323 124.384,37.473 127.564,37.473 v4(139.175,37.472)
NetHB1_2: HB1.2 Inverter.2 | length 36.3
  Top Layer w0.254: HB1.2 147.578,37.41 v1(147.269,37.719) 146.761,37.719 146.304,37.262 146.304,36.576 150.241,32.639 170.18,32.639 172.237,34.696 175.166,34.696 175.7,35.23 Inverter.2
NetHB1_5: HB1.5 R6.1
NetHB2_2: HB2.2 Inverter.5 | length 34.2
  Top Layer w0.254: v1(155.829,37.694) 156.036,37.486 HB2.2 ; Inverter.5 v1(177.267,38.989)
  Bottom Layer w0.254: v1(155.829,37.694) 155.219,37.694 154.737,37.211 154.737,36.144 155.956,34.925 161.392,34.925 164.516,38.049 164.516,39.345 166.091,40.919 170.028,40.919 174.498,36.449 176.149,36.449 177.267,37.567 v1(177.267,38.989)
NetHB2_5: HB2.5 R5.1
NetHB3_2: HB3.2 Inverter.7 | length 17
  Top Layer w0.254: HB3.2 164.977,37.334 164.49,37.821 164.49,39.599 166.522,41.631 v1(171.653,41.631) ; v1(173.66,40.488) 175.26,40.488 175.7,40.048 Inverter.7
  Bottom Layer w0.254: v1(171.653,41.631) 172.796,40.488 v1(173.66,40.488)
NetHB3_5: HB3.5 R4.1
NetLabel215: "Sun Sensor 1.1"
  other v3: 153.889,20.73
NetLabel216: "Sun Sensor 1.2"
  other v3: 153.889,23.27
PT1: "Sun Conn.11" "Sun Mux.9" | length 22.3
  Top Layer w0.254: 159.178,73.406 159.178,75.257 162.636,78.715 167.741,78.715 170.075,76.381 172.844,76.381 174.86,74.365 176.388,74.365
PT2: "Sun Conn.12" "Sun Mux.8" | length 21.6
  Top Layer w0.254: 159.828,73.406 159.828,75.188 162.847,78.207 167.531,78.207 169.865,75.873 172.362,75.873 174.87,73.365 176.388,73.365
PT3: "Sun Conn.13" "Sun Mux.7" | length 20.9
  Top Layer w0.254: 160.478,73.406 160.478,75.12 163.057,77.699 167.32,77.699 169.654,75.365 171.854,75.365 174.854,72.365 176.388,72.365
PT4: "Sun Conn.1" "Sun Mux.6" | length 13.3
  Top Layer w0.254: 161.128,73.406 161.128,75.051 163.268,77.191 167.11,77.191 169.936,74.365 170.688,74.365
PT5: "Sun Conn.2" "Sun Mux.5" | length 13
  Top Layer w0.254: 161.778,73.406 161.778,74.983 163.478,76.683 166.9,76.683 168.681,74.901 168.681,74.143 169.443,73.381 170.672,73.381
PT6: "Sun Conn.3" "Sun Mux.4" | length 12.6
  Top Layer w0.254: 162.428,73.406 162.428,74.914 163.689,76.175 166.689,76.175 168.173,74.69 168.173,73.508 169.316,72.365 170.688,72.365
PT7: "Sun Conn.4" "Sun Mux.3" | length 12
  Top Layer w0.254: 163.078,73.406 163.078,74.846 163.899,75.667 166.479,75.667 167.665,74.48 167.665,73 169.3,71.365 170.688,71.365
PT8: "Sun Conn.5" "Sun Mux.2" | length 11.5
  Top Layer w0.254: 163.728,73.406 163.728,74.778 164.109,75.159 166.268,75.159 167.157,74.27 167.157,72.492 169.284,70.365 170.688,70.365
PT9: "Sun Conn.6" "Sun Mux.23" | length 11.6
  Top Layer w0.254: 163.728,66.548 163.728,65.126 164.109,64.745 166.555,64.745 167.157,65.347 167.157,67.285 169.237,69.365 170.688,69.365
PT10: "Sun Conn.7" "Sun Mux.22" | length 12.1
  Top Layer w0.254: 163.078,66.548 163.078,65.057 163.899,64.237 166.766,64.237 167.665,65.136 167.665,66.777 169.253,68.365 170.688,68.365
PT11: "Sun Conn.8" "Sun Mux.21" | length 12.6
  Top Layer w0.254: 162.428,66.548 162.428,64.989 163.689,63.729 166.976,63.729 168.173,64.926 168.173,66.269 169.269,67.365 170.688,67.365
PT12: "Sun Conn.9" "Sun Mux.20" | length 13.2
  Top Layer w0.254: 161.778,66.548 161.778,64.92 163.478,63.221 167.187,63.221 168.681,64.715 168.681,65.761 169.285,66.365 170.688,66.365
PT13: "Sun Conn.10" "Sun Mux.19" | length 13.2
  Top Layer w0.254: 161.128,66.548 161.128,64.852 163.268,62.713 167.397,62.713 170.049,65.365 170.688,65.365
PT14: "Sun Conn.14" "Sun Mux.18" | length 24.8
  Top Layer w0.254: 160.478,66.548 160.478,64.784 163.057,62.205 167.607,62.205 169.767,64.365 171.654,64.365 172.136,64.846 172.136,68.656 174.844,71.365 176.388,71.365
PT15: "Sun Conn.15" "Sun Mux.17" | length 25.3
  Top Layer w0.254: 159.828,66.548 159.828,64.715 162.847,61.697 167.818,61.697 169.978,63.857 171.865,63.857 172.644,64.636 172.644,68.174 174.835,70.365 176.388,70.365
PT16: "Sun Conn.16" "Sun Mux.16" | length 25.8
  Top Layer w0.254: 159.178,66.548 159.178,64.647 162.636,61.189 168.028,61.189 170.188,63.349 172.075,63.349 173.152,64.425 173.152,67.666 174.851,69.365 176.388,69.365
"PWM 1": "Teensy 3.2 Headers.8" C19.1 HB3.6 | length 36.6
  Top Layer w0.254: HB3.6 168.398,36.834 169.269,35.963 C19.1 171.853,35.963 172.568,36.678 172.568,40.792 175.997,44.221 177.292,44.221 177.927,44.856 177.927,57.912 177.368,58.471 174.93,58.471 v1(173.761,59.639)
  Bottom Layer w0.254: 171.704,59.639 v1(173.761,59.639)
"PWM 2": "Teensy 3.2 Headers.11" C20.1 HB2.6 | length 22.7
  Top Layer w0.254: HB2.6 161.816,36.986 v1(161.925,36.878) ; v1(167.335,43.586) 167.335,46.482 168.704,47.851 v1(168.704,48.87)
  Bottom Layer w0.254: v1(161.925,36.878) 163.144,38.097 163.144,42.469 164.262,43.586 v1(167.335,43.586) ; v1(168.704,48.87) 168.704,52.019
"PWM 3": "Teensy 3.2 Headers.27" C21.2 HB1.6 | length 35.1
  Top Layer w0.254: HB1.6 154.207,36.91 154.762,37.465 154.762,41.885 v1(158.369,45.491) ; v1(158.09,53.95) 158.801,53.238 158.801,52.019 160.223,50.597 160.223,46.101 v1(160.68,45.644)
  Bottom Layer w0.254: 156.464,62.179 158.623,60.02 158.623,56.312 158.09,55.778 v1(158.09,53.95) ; v1(158.369,45.491) 158.521,45.644 v1(160.68,45.644)
RX3: "ADCS Conn.3" "Teensy 3.2 Headers.9" | length 24.8
  Top Layer w0.254: 149.225,46.553 151.861,46.553 155.499,50.19 v1(157.175,50.19)
  Bottom Layer w0.254: v1(157.175,50.19) 158.267,50.19 159.944,51.867 159.944,53.518 161.798,55.372 166.977,55.372 168.704,57.099
S1: "CS Mux.2" "DigiPot 3.12" | length 12.7
  Top Layer w0.254: 166.243,99.786 170.47,99.786 172.949,97.307 175.438,97.307 175.981,96.765 175.981,95.098
S2: "CS Mux.9" "DigiPot 1.12" | length 13.7
  Top Layer w0.254: 166.243,85.1 169.428,85.1 171.374,87.046 171.374,88.24 172.364,89.23 175.514,89.23 175.981,89.697 175.981,91.008
S3: "CS Mux.4" "DigiPot 2.12" | length 13.4
  Top Layer w0.254: 166.243,92.466 171.054,92.466 171.907,93.32 171.907,95.733 172.949,96.774 174.65,96.774 174.981,96.444 174.981,95.098
SCK: "DigiPot 1.11" "DigiPot 2.11" "DigiPot 3.11" "Teensy 3.2 Headers.20" | length 92.3
  Top Layer w0.254: v1(164.824,84.455) 166.239,84.455 166.243,84.45 ; v1(164.824,91.821) 166.239,91.821 166.243,91.816 ; v1(164.824,99.136) 166.243,99.136
  Bottom Layer w0.254: 153.464,44.399 168.707,44.399 170.002,45.695 172.669,45.695 175.768,48.793 175.768,85.471 174.371,86.868 171.221,86.868 168.808,84.455 v1(164.824,84.455) v1(164.824,91.821) v1(164.824,99.136)
SCL0: "IMU Conn.4" "Teensy 3.2 Headers.26" | length 40.3
  Top Layer w0.254: v2(152.375,59.665) 153.238,60.528 153.238,77.089 v1(156.667,80.518)
  Bottom Layer w0.254: v1(156.667,80.518) 159.131,82.982 170.586,82.982 v1(172.542,84.938)
SDA0: "IMU Conn.3" "Teensy 3.2 Headers.25" | length 41.4
  Top Layer w0.254: v2(155.372,57.074) 153.873,58.572 153.873,76.073 v1(157.556,79.756)
  Bottom Layer w0.254: v1(157.556,79.756) 160.122,82.321 171.171,82.321 v1(172.542,83.693)
TX3: "ADCS Conn.4" "Teensy 3.2 Headers.10" | length 27.2
  Top Layer w0.254: 149.225,45.303 151.932,45.303 155.677,49.047 v1(157.15,49.047)
  Bottom Layer w0.254: v1(157.15,49.047) 158.267,49.047 160.909,51.689 160.909,53.137 162.331,54.559 171.704,54.559
pads on no net: "ADCS Conn.5" "ADCS Conn.6" "CS Mux.7" "DigiPot 1.5" "DigiPot 1.10" "DigiPot 1.14" "DigiPot 2.5" "DigiPot 2.10" "DigiPot 2.14" "DigiPot 3.5" "DigiPot 3.10" "DigiPot 3.14" "HS Mux.7" "IMU Conn." "Sun Conn.17" "Sun Conn.18" ADCSHS1.GND ADCSHSC2.GND ADCSHSC3.GND Motor1.2 Motor1.5 Motor1.6 Motor2.2 Motor2.5 Motor2.6 Motor3.2 Motor3.5 Motor3.6
copper on no net: | length 0
  Top Layer w0.254: 170.672,73.381 170.688,73.365
  other v1: 176.733,41.377 176.733,46.634 176.708,49.047 176.708,54.28 176.708,61.874 176.886,66.365
  other v2: 176.682,78.588 176.428,87.528

## Silkscreen, mask and mechanical layers (free items; w line width, h text height)
Mechanical 1:
  lines w0.254: 143.764,28.194 178.816,28.194 ; 166,16.688 166,28.194 ; 148.5,19 148.5,25 159,25 159,19 148.5,19